# Altium PCB black_V6.PcbDoc
Units mil, origin at the board's own origin, x right, y up, seen from the top; angles counter-clockwise.
Board outline 3814 x 3789 mil, 2 copper layers (Top Layer, Bottom Layer); 76 components, 81 nets, 250 pads, 50 vias.
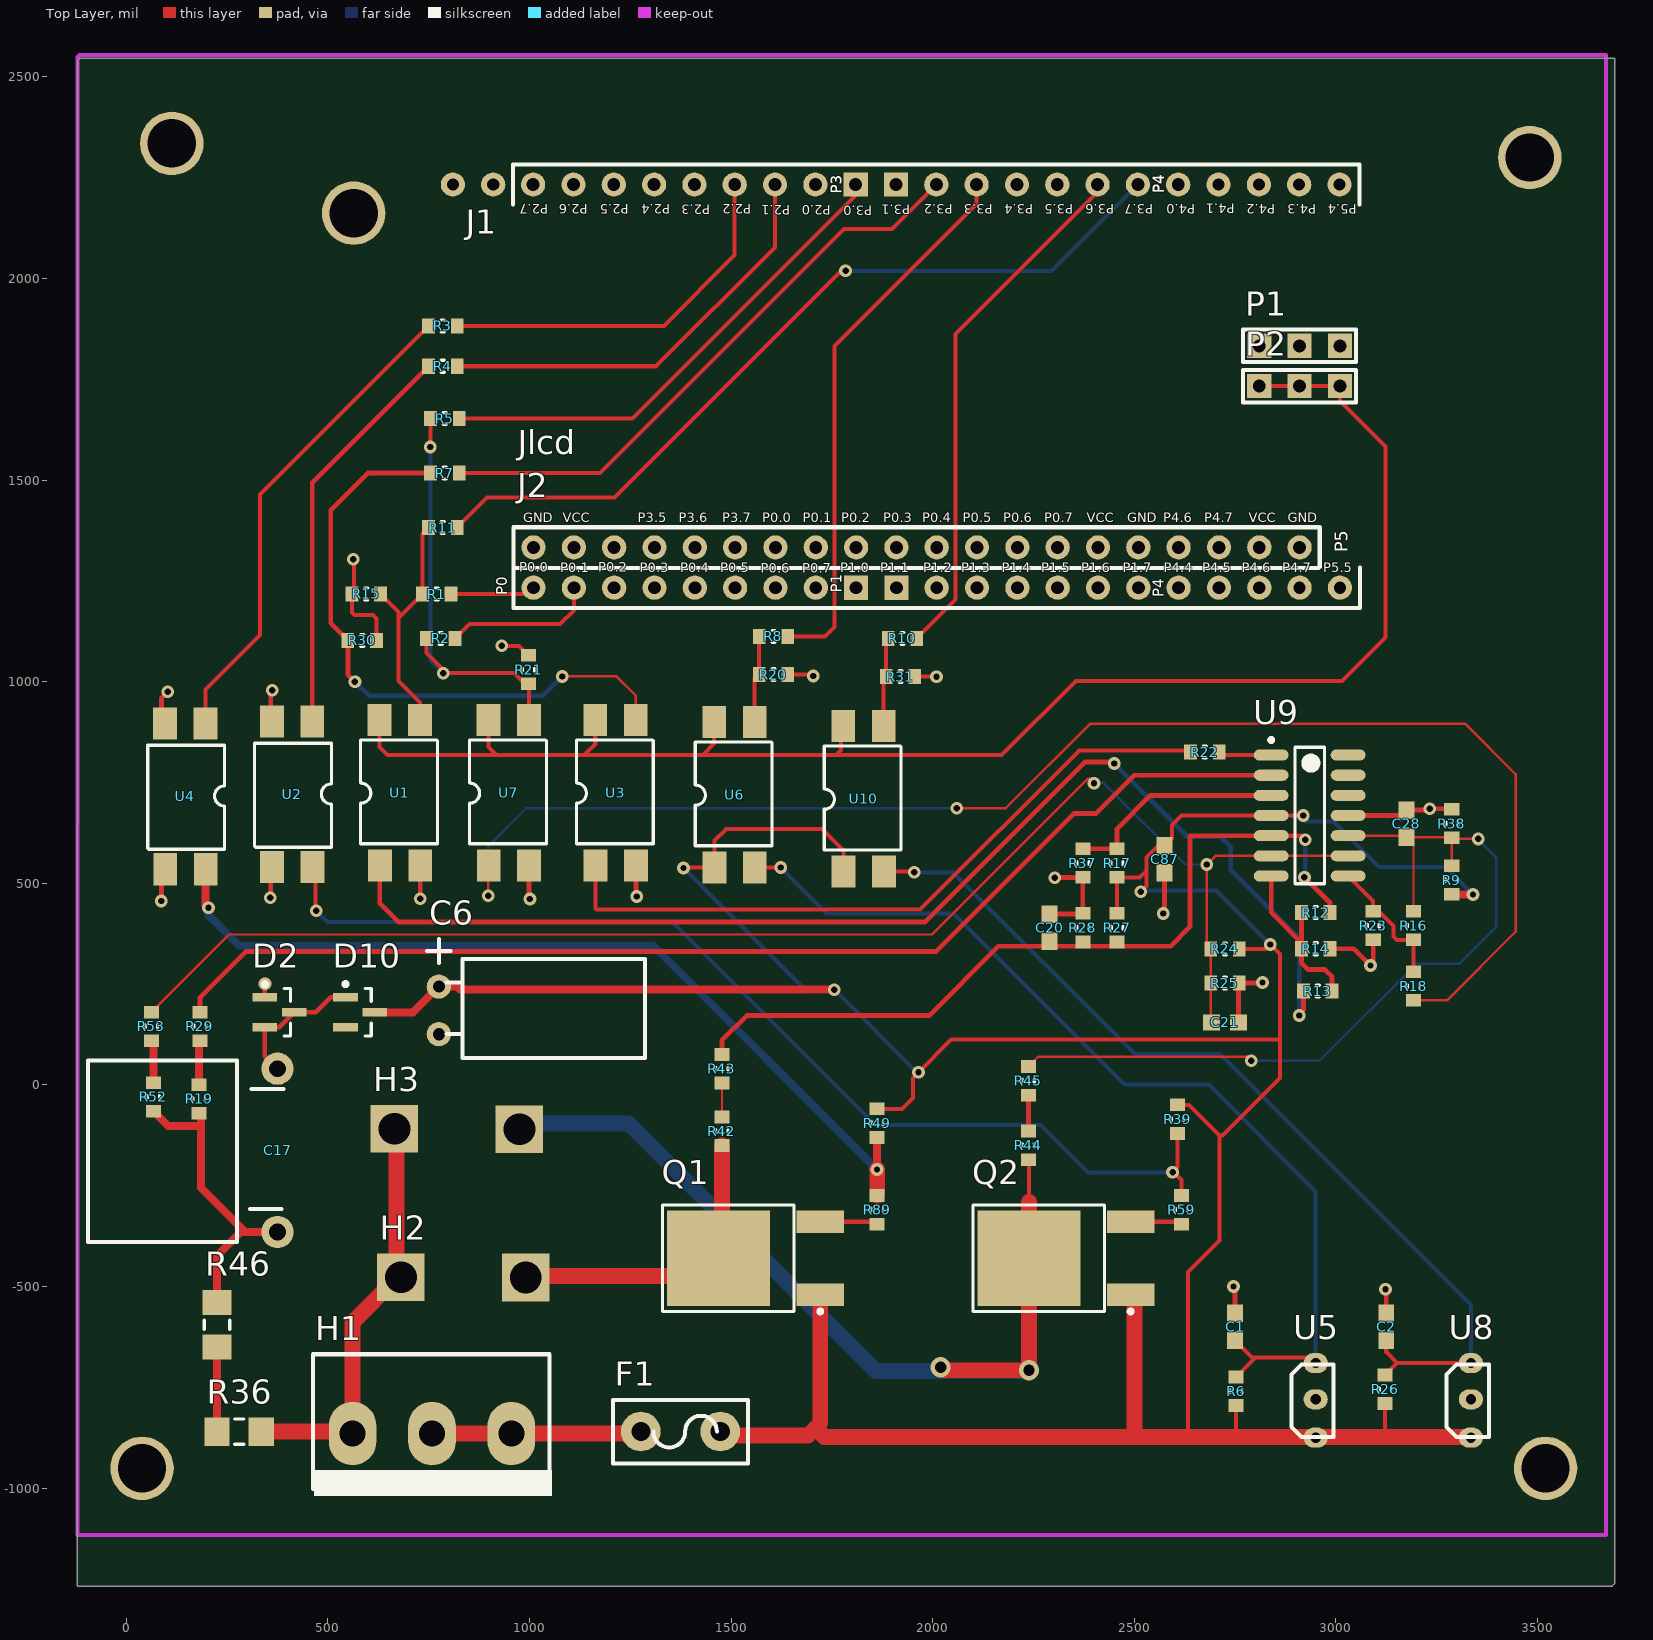
[diagram p0: Top Layer view]
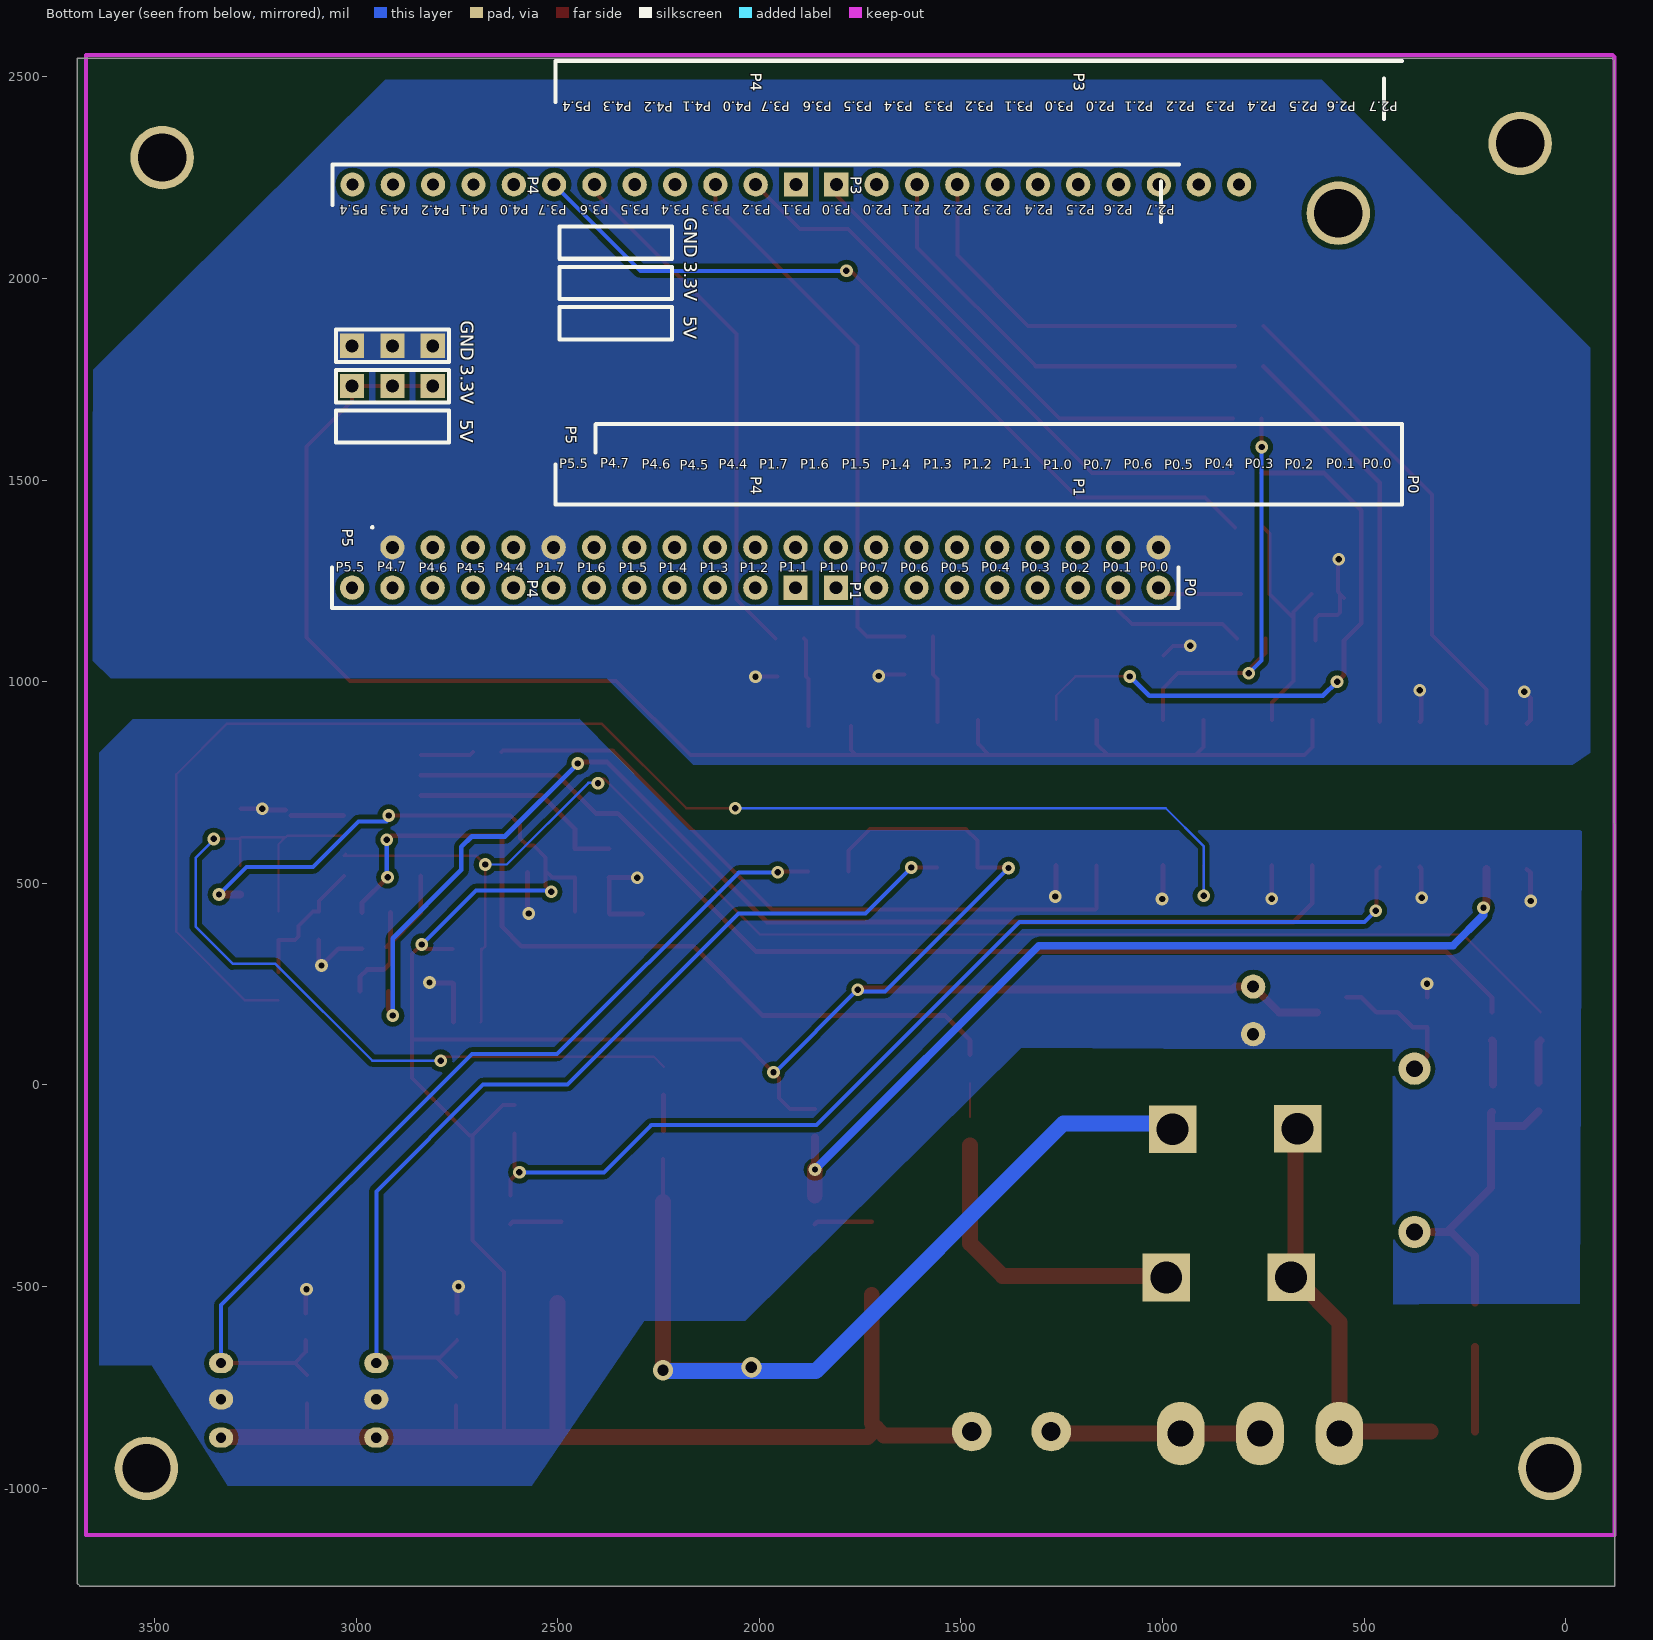
[diagram p1: Bottom Layer view, seen from below]

## Layer stack, top to bottom
Top Solder: solder mask 0.4, Solder Resist, Dk 3.5
Top Layer: signal copper 1.4
Dielectric1: dielectric 12.6, FR-4, Dk 4.8
Bottom Layer: signal copper 1.4
Bottom Solder: solder mask 0.4, Solder Resist, Dk 3.5

## Board outline
-121,2540 -115,2546 3692,2546 3692,-1236 3685,-1243 -122,-1243

## Design rules (kind name [scope] priority, off if disabled: settings)
Clearance Clearance_1 [All] p1: gap=11.81 ignorepadtopadclearanceinfootprint=FALSE except(0: Arc-Hole Track-Hole SMDPad-Hole THPad-Hole Via-Hole Fill-Hole Poly-Hole Region-Hole Text-Hole)
Clearance [All] p2 off: gap=8 ignorepadtopadclearanceinfootprint=FALSE except(0: Arc-Hole Track-Hole SMDPad-Hole THPad-Hole Via-Hole Fill-Hole Poly-Hole Region-Hole Text-Hole)
FabricationTestPointUsage TestPointUsage [All] p1: valid=0 allowmultiple=FALSE
FabricationTestpoint Testpoint [All] p1: side=3 testpointundercomponent=TRUE minsize=40 maxsize=100 preferedsize=60 minholesize=0 maxholesize=40 preferedholesize=32 testpointgrid=1 allowsidetop=TRUE allowsidebottom=TRUE usegrid=TRUE gridtolerance=0.01
PlaneConnect [All] p1: planeconnectstyle=Direct reliefexpansion=20 reliefentries=4 reliefconductorwidth=10 reliefairgap=10
PolygonConnect [All] p1: connectstyle=Direct reliefconductorwidth=10 reliefentries=4 polygonreliefangle="90 Angle" airgapwidth=10
RoomDefinition black_V4 [InComponentClass('black_V4')] p1: confinementstyle=ConfineIn formatcopy=TRUE lockcomponents=FALSE outline -122,-1249 3730,-1249 3730,2533 -122,2533
RoutingVias [All] p1: holewidth=15.75 width=31.5 viastyle="Through Hole" minholewidth=15.75 minwidth=31.5 maxholewidth=15.75 maxwidth=31.5
ShortCircuit [All] p1 off: allowed=FALSE
SilkToSolderMaskClearance SilkscreenOverComponentPads [IsPad] p1: minsilkscreentomaskgap=10 clearancetoexposedcopper=TRUE
SolderMaskExpansion [All] p1: expansion=4
UnRoutedNet [All] p1 off:
Width [All] p1: maxlimit=78.74 minlimit=6 preferedwidth=10 minimp=50.000000 maximp=50.000000 favimp=50.000000
24 further rules are at their usual default settings.

## Components (designator, comment, footprint, x,y, rotation, side; value= is the part's Value field where it differs from the comment)
C1 "0.01u" 1608[0603] 2750,-600 r90 top
C2 "0.01u" 1608[0603] 3125,-600 r90 top
C6 "Tan-cap" ecap 1090,165 r270 top
C17 "220n" filmcap 120,-255 r180 top
C20 "0.1u" 1608[0603] 2290,390 r90 top
C21 "0.1u" 1608[0603] 2725,155 r0 top
C28 "0.1u" 1608[0603] 3175,648 r90 top
C87 "0.1u" 1608[0603] 2575,560 r90 top
D2 "BAT54S" SOT23_D 355,180 r270 top
D10 "BZX84-C5V1" SOT23_D 555,180 r270 top
F1 "Fuse 1A" FUSE_L 1355,-840 r270 top
H1 "MOT" H_3 760,-865 r0 top
H2 "MOT1" MOT 991,-537 r180 top
H3 "MOT2" MOT 975,-169.06 r180 top
J1 "" J1 1009,2233 r0 top
J2 "" J2 1010,1233 r0 top
Jlcd "LED1602-12864" jlcd 1010,1333 r0 top
P1 "Header 3" PP 3010,1833 r180 top locked
P2 "Header 3" PP 3010,1733 r180 top locked
Q1 "BTA204S-800C" SCR 1630,-455 r180 top
Q2 "BTA204S-800C" SCR 2400,-455 r180 top
R1 "0" R0603 750,1215 r90 top
R2 "0" R0603 760,1105 r90 top
R3 "0" R0603 765,1880 r90 top
R4 "0" R0603 765,1780 r90 top
R5 "0" R0603 770,1650 r90 top
R6 "10k" R0603 2750,-740 r0 top
R7 "0" R0603 770,1515 r90 top
R8 "0" R0603 1585,1110 r90 top
R9 "20k" R0603 3285,528 r0 top
R10 "0" R0603 1905,1105 r90 top
R11 "0" R0603 765,1380 r90 top
R12 "20k" R0603 2930,425 r90 top
R13 "20k" R0603 2935,230 r90 top
R14 "20k" R0603 2970,340 r270 top
R15 "10k" R0603 615,1220 r270 top
R16 "20k" R0603 3195,375 r180 top
R17 "100k" R0603 2455,570 r0 top
R18 "20k" R0603 3195,225 r180 top
R19 "470K" R0603 182.64,-54.96 r180 top
R20 "10k" R0603 1585,1015 r90 top
R21 "10k" R0603 1000,1010 r180 top
R22 "3k" R0603 2655,823 r90 top
R23 "20k" R0603 3095,375 r180 top
R24 "20k" R0603 2705,335 r90 top
R25 "20k" R0603 2745,255 r270 top
R26 "10k" R0603 3120,-735 r0 top
R27 "20k" R0603 2460,370 r180 top
R28 "20k" R0603 2370,410 r0 top
R29 "470K" R0603 185,125 r180 top
R30 "10k" R0603 565,1100 r90 top
R31 "10k" R0603 1900,1010 r90 top
R36 "470" 3216[1206] 280,-860 r180 top
R37 "100k" R0603 2375,530 r180 top
R38 "20k" R0603 3285,668 r0 top
R39 "10k" R0603 2605,-65 r0 top
R42 "330K" R0603 1475,-95 r0 top
R43 "330K" R0603 1475,60 r0 top
R44 "330K" R0603 2235,-130 r0 top
R45 "330K" R0603 2235,30 r0 top
R46 "470" 3216[1206] 225,-595 r90 top
R49 "10k" R0603 1860,-75 r0 top
R52 "330K" R0603 65,-10 r0 top
R53 "330K" R0603 60,165 r0 top
R59 "33" R0603 2615,-290 r0 top
R89 "33" R0603 1860,-290 r0 top
U1 "PS2501" DIP-4SMD 685,720 r90 top
U2 "PS2501" DIP-4SMD 405,725 r270 top
U3 "PS2501" DIP-4SMD 1220,720 r90 top
U4 "PS2501" DIP-4SMD 140,720 r270 top
U5 "HALL" M1881 2950,-795 r90 top
U6 "PS2501" DIP-4SMD 1515,715 r90 top
U7 "PS2501" DIP-4SMD 955,720 r90 top
U8 "HALL" M1881 3335,-795 r90 top
U9 "LM324" SOP14 2935,668 r0 top
U10 "PS2501" DIP-4SMD 1835,705 r90 top

## Footprints (in the part's own frame and the unit in brackets; to place one, negate y for a bottom-side part, rotate by r counter-clockwise, add the part's x,y. Pads: shape width x height; smd on the part's side, far side on the other; paste and mask are expansions set on the pad)
1608[0603] [mm] "Chip Capacitor; Body 1.6 x 0.8 mm (LxW typ)"
  rect 1.1x1 smd: 1(-0.85,0) 2(0.85,0)
3216[1206] [mm] "Chip Resistor; Body 3.2 x 1.6 mm (LxW typ)"
  rect 1.6x1.8 smd: 1(-1.4,0) 2(1.4,0)
  silkscreen extent -0.3,-0.8 0.3,0.8
DIP-4SMD [mil]
  rect 80x59.06 smd: 1(-176.07,56.13) 2(-176.07,-43.87) 3(184.95,-43.47) 4(184.95,56.92)
  silkscreen extent -122,-87 136,104
ecap [mil]
  round 60 hole 30: 1(-78.74,-314.96) 2(39.37,-314.96)
  silkscreen extent -197,-344 98,197
filmcap [mil]
  round 80 hole 42: 1(-255,110) 2(-255,-295)
  silkscreen extent -270,-315 215,135
FUSE_L [mm]
  round 2.5 hole 1.2: 1(0.5,3) 2(0.5,-2)
  silkscreen extent -1.49,-3.75 2.51,4.75
H_3 [mm]
  oval 3x4 hole 1.65: 1(-5.047,0) 2(-0.047,0) 3(4.953,0)
  silkscreen extent -7.55,-3.94 7.51,5
J1 [mil]
  round 60 hole 32: 1(0,0) 2(100,0) 3(200,0) 4(300,0) 5(400,0) 6(500,0) 7(600,0) 8(700,0) 11(1000,0) 12(1100,0) 13(1200,0) 14(1300,0) 15(1400,0) 16(1500,0) 17(1600,0)
  rect 60x60 hole 32: 9(800,0) 10(900,0)
  round 60 hole 30: 18(1700,0) 19(1800,0) 20(1900,0) 21(2000,0)
  silkscreen extent -50,-50 2050,50
J2 [mil]
  round 60 hole 32: 1(0,0) 2(100,0) 3(200,0) 4(300,0) 5(400,0) 6(500,0) 7(600,0) 8(700,0) 11(1000,0) 12(1100,0) 13(1200,0) 14(1300,0) 15(1400,0) 16(1500,0) 17(1600,0) 18(1700,0)
  rect 60x60 hole 32: 9(800,0) 10(900,0)
  round 60 hole 30: 19(1800,0) 20(1900,0) 21(2000,0)
  silkscreen extent -50,-50 2050,50
jlcd [mil]
  round 60 hole 32: 1(0,0) 2(100,0) 3(200,0) 4(300,0) 5(400,0) 6(500,0) 7(600,0) 8(700,0) 9(800,0) 10(900,0) 11(1000,0) 12(1100,0) 13(1200,0) 14(1300,0) 15(1400,0) 16(1500,0) 17(1600,0) 18(1700,0) 19(1800,0) 20(1900,0)
  silkscreen extent -50,-51 1950,50
M1881 [mil]
  oval 50x60 hole 25.59: 1(-80,0) 2(15,0) 3(105,0)
  silkscreen extent -79,-45 101,60
MOT [mm]
  rect 3x3 hole 2: 1(0,-1.5) 2(7.874,-1.524)
PP [mil]
  rect 60x60 hole 32: 1(0,0) 2(100,0) 3(200,0)
  silkscreen extent -40,-40 240,40
R0603 [mm]
  rect 0.95x0.8 smd: 1(0.06,0.392) 2(0.06,-1.408)
  silkscreen extent -0.32,-0.61 0.44,-0.41, body extent -0.39,-1.36 0.51,0.34, height 0.6
SCR [mm]
  rect 6.5x6 smd: 1(4.095,-0.635)
  rect 3x1.4 smd: 2(-2.315,-2.935) 3(-2.315,1.665)
  silkscreen extent -2.44,-3.98 7.62,2.84, body extent -1.21,-3.99 7.24,2.72, height 1.8
SOP14 [mm] "TSOP, 14-Leads, Body 8.6x4.0mm (max), Pitch 1.27mm, IPC Medium Density"
  oval 2.2x0.7 smd: 1(-2.425,3.81) 2(-2.425,2.54) 3(-2.425,1.27) 4(-2.425,0) 5(-2.425,-1.27) 6(-2.425,-2.54) 7(-2.425,-3.81) 8(2.425,-3.81) 9(2.425,-2.54) 10(2.425,-1.27) 11(2.425,0) 12(2.425,1.27) 13(2.425,2.54) 14(2.425,3.81)
  silkscreen extent -2.55,-4.3 0.93,4.88, body extent -2,-4.33 2,4.33, height 1
SOT23_D [mm]
  rect 0.55x1.55 smd: 1(-0.95,-0.29) 2(0.95,-0.29) 3(0,1.56)
  silkscreen extent -1.9,-0.41 1.5,1.34, body extent -1.5,-0.06 1.5,1.34, height 1.1

## Part data
C1 C2 C17 C20 C21 C28 C87: library part "CAP NP", "CAP NL"
C6: library part "Cap Pol1", "Polarized Capacitor (Radial)"
D10: library part "D Zener", "Zener Diode"
F1: library part "Fuse 2", "Fuse"
H1 U5 U8: library part "Header 3", "Header, 3-Pin"
H2 H3: library part "Header 2", "Header, 2-Pin"
J1: library part P152
J2: library part P151
P1 P2: "Header, 3-Pin"
Q1 Q2: library part SCR, "Silicon Controlled Rectifier"
R1 R2 R3 R4 R5 R6 R7 R8 R9 R10 R11 R12 R13 R14 R15 R16 R17 R18 R19 R20 R21 R22 R23 R24 R25 R26 R27 R28 R29 R30 R31 R36 R37 R38 R39 R42 R43 R44 R45 R46 R49 R52 R53 R59 R89: library part RES, "RES"
U1 U2 U3 U4 U6 U7 U10: library part Optoisolator1, "4-Pin Phototransistor Optocoupler"

## Free pads (board coordinates)
  round 60 hole 30: 0(910,2233) 1(810,2233)
  round 157.48 hole 120.08: 3(39,-951) 3(113,2335) 3(564,2162) 3(3481,2300) 3(3520,-951)

## Via types
v1: diameter 31.5, hole 15.75, Top Layer to Bottom Layer, 48 vias
v2: diameter 50, hole 28, Top Layer to Bottom Layer, 2 vias

## Nets (pads, with @x,y where several pads share a name; then routed paths per layer and width w, separated by ;. In a path a pad name is that pad's centre, name@x,y a point inside that pad or via, vN(x,y) a via of type N, cw(c..) or ccw(c..) an arc to the next point about the centre after c; other vN are vias at no path point)
3V3: P2.1 P2.2 P2.3 U1.4 U3.4 U6.4 U7.4 U10.4 | length 3930.6
  Top Layer w10: U1.4 628.08,837.92 648,818 918,818 ; U7.4 898.08,837.92 918,818 ; U3.4 1163.08,845.92 1135.16,818 ; U6.4@1458.08,904.95 U6.4 1458.08,846.08 1430,818 ; U10.4@1773.08,889.95 1773.08,831.08 1760,818 ; P2.3 P2.2 P2.1 3010,1696 3123,1583 3123,1110 3015,1002 2355,1002 2171,818 1760,818 ; 918,818 1135.16,818 ; 1135.16,818 1430,818 ; 1430,818 1760,818
5V: C6.1 C87.2 D10.3 F1.1 Q1.3 Q2.3 R6.2 R9.2 R17.2 R24.2 R26.2 R27.2 R39.1 R49.1 U5.1 U6.1 U8.1 U9.4 U10.1 | length 9487.6
  Top Layer w10: v1@1382.93,538.93 U6.1 1458.87,605.87 1488,635 1725,635 1778.87,581.13 U10.1 ; R49.1 1924.43,-59.57 1951,-33 1951,17 v1(1965,31) 2046,112 2861,112 ; R27.2@2457.36,429.84 R17.2 2513.57,514.57 2530,531 ; v1(2516.29,479.29) 2530,493 2530,531 ; R39.1 2635.57,-49.57 2711,-125 2711,-386 2633,-464 2633,-859 2640,-866 ; 2719,-125 2861,17 2861,112 ; 2752.36,-869.64 R6.2 ; R24.2 2826.36,337.36 v1(2837,348) 2861,324 2861,112 ; v1(2919,668) U9.4 2617,668 2593,644 2593,611.46 C87.2 2559.46,593.46 2530,564 2530,531 ; 3122.36,-872.36 R26.2
  Top Layer w19.68: D10.3 711.3,180 C6.1 819.26,243.74 827,236 v1(1756,236) ; R9.2 3339.43,472.57 v1(3340,472)
  Top Layer w39.37: F1.1@1472,-869.68 1690.91,-869.68 1709.45,-851.14 ; Q1.3 1721.14,-839.45 1709.45,-851.14 ; Q2.3@2501,-540.55 2501,-873 ; U8.1@3335,-873 2501,-873 ; 1709.45,-851.14 1731.31,-873 1964,-873 2501,-873
  Bottom Layer w10: v1(1382,538) 1688,232 v1@1752,232 ; v1(1756,236) v1@1962,30 ; v1(2516.29,479.29) 2519,482 2703,482 v1(2837,348) v1@2837,349 ; v1(2919,668) 2919,659 2925,653 2994,653 3106.56,540.44 3271.56,540.44 v1(3340,472)
A: J1.9 R5.2 | length 1239.9
  Top Layer w10: R5.2 1255.36,1652.36 1809,2206 J1.9
AC: R7.1 R30.1 U3.3 | length 1551.8
  Top Layer w6: v1(1081,1013) 1216,1013 1263.47,965.53 U3.3
  Top Layer w11.81: v1(567,1000) 549.57,1017.43 R30.1 507,1144.93 507,1425 599.36,1517.36 R7.1
  Bottom Layer w6: v1@1076,1013 v1(1081,1013)
  Bottom Layer w11.81: v1(567,1000) 602,965 1033,965 v1(1081,1013)
AC_DET: C17.1 R19.1 R46.2 R52.2 | length 767.6
  Top Layer w19.68: R52.2 103.93,-102 185,-102 ; R19.1@182.64,-67 185,-69.36 185,-102 ; R46.2 225,-424 284,-365 295,-365 ; C17.1 295,-365 ; 185,-102 185,-255 295,-365
AGND: Jlcd.1 Jlcd.16 Jlcd.20 P1.1 P1.2 P1.3 R15.2 R20.2 R21.2 R30.2 R31.2 U2.2 U4.2 | length 638.6
  Top Layer w10: R15.2@549.57,1207.64 R15.2 ; v1(562.53,1304) 563.1,1304 565,1302.1 565,1223.07 R15.2 ; R30.2 620.43,1156.57 612,1165 566,1165 559.57,1171.43 R15.2 ; v1(931,1089) 974.07,1089 R21.2 ; R20.2 1693.64,1017.36 1695,1016 1702,1016 v1(1704,1014) ; R31.2 v1(2009.64,1012.36)
  Top Layer w11.81: U4.2 87.57,904.64 87.57,959.57 v1(103,975) ; U2.2 358,904.2 358,978 359,979 v1(362,979)
B: J1.10
GND: C1.2 C2.2 C6.2 C20.2 C21.2 C28.2 C87.1 D2.1 R14.1 R23.1 R25.1 R28.1 R37.1 R38.1 U1.2 U2.3 U3.2 U4.3 U5.2 U7.2 U8.2 U9.11 | length 1500.1
  Top Layer w11.81: v1(87,456) 87,525.52 U4.3 ; D2.1 343.58,250.58 v1(344,251) ; v1@358,460 358,536.52 U2.3 ; U1.2 728.87,461.87 v1(729.13,461.87) ; U7.2 998.87,463.13 v1(1001,461) ; U3.2 1263.87,468.07 1264.94,467 v1(1266,467) ; C20.2 2370.39,423.46 R28.1 R37.1@2372.36,514.29 ; v1(2303,514) 2372.07,514 R37.1@2372.36,514.29 ; R37.1 R37.1@2372.36,514.29 ; v1(2572,425) 2575,428 C87.1 ; v1(2746,-500) 2750,-504 C1.2 ; C21.2 2758.46,250.67 R25.1 2816.64,252.64 v1(2818,254) ; R14.1 3044.36,337.64 v1(3086,296) 3092.64,302.64 R23.1 ; U9.11 C28.2@3161.54,668 ; v1(3123,-507) 3125,-509 C2.2 ; C28.2 3229.46,681.46 v1(3233,685) R38.1@3285.8,685
  other v1: 357,464
HALL1: R8.1 R20.1 U6.3 | length 217
  Top Layer w10: U6.3 1558.47,1006.27 R20.1 R8.1
HALL2: R10.1 R31.1 U10.3 | length 222
  Top Layer w10: U10.3 1878.47,1006.27 R31.1 1884.57,1102.36 R10.1
HALLA: R1.1 R11.1 R15.1 U1.3 | length 608.7
  Top Layer w10: R15.1 675,1173.07 675,1157.8 ; U1.3 728.47,948.53 675,1002 675,1157.8 ; R11.1 734.57,1367.36 R1.1 675,1157.8
HALLB: R2.1 R5.1 R21.1 U7.3 | length 1052.4
  Top Layer w10: R2.1 744.57,1071 v1@790.28,1025.28 ; v1(754,1582) 754.57,1582.57 R5.1 ; v1(786,1021) 961,1021 998.47,983.53 U7.3
  Bottom Layer w10: v1(754,1582) 754,1053 v1(786,1021)
I1: C20.1 R12.2 R27.1 R28.2 R43.1 U9.5 | length 2036.1
  Top Layer w11.81: R43.1 1477.36,110.36 1539,172 1991,172 2163,344 2590,344 2638,392 2638,618 U9.5 2914,618 v1(2924,608) ; v1(2922,515) 2985.43,451.57 R12.2
  Bottom Layer w11.81: v1(2922,515) 2924,517 v1(2924,608)
I2: C28.1 R9.1 R16.2 R38.2 R45.1 U9.10 | length 2135
  Top Layer w6: R45.1 2261.93,70 2780,70 v1(2790,60) ; U9.10 3171.54,618 C28.1 ; R16.2 3192.64,596.9 C28.1 ; R38.2@3285.39,614.54 C28.1 ; R9.1 R38.2 3289.93,610 v1(3353,610)
  Bottom Layer w6: v1(2790,60) 2960,60 3200,300 3305,300 3398,393 3398,563 3351,610 v1(3353,610)
I-: C21.1 R24.1 R25.2 R53.1 U9.6 U9.9 | length 3720.4
  Top Layer w6: R53.1 254.93,373 1998,373 2384,759 2397,759 2400,756 v1(2400,748) ; v1@2680.06,552.12 v1(2680.06,546.48) ; R24.1@2687.5,335.3 2680.06,342.74 v1(2680.06,546.48) ; R24.1 R25.2 2689.57,156.97 C21.1 ; U9.9@3025.47,573 U9.9 U9.6 2701.58,568 v1(2680.06,546.48)
  Bottom Layer w6: v1(2400,748) 2401,749 2424,749 2626.52,546.48 v1(2680.06,546.48)
MOS1: R4.1 U2.1 | length 1000.8
  Top Layer w11.81: U2.1 461.13,1493.93 R4.1
MOS2: R3.1 U4.1 | length 1215.5
  Top Layer w10: U4.1 196.13,981.13 331,1116 331,1463.8 R3.1
MOT1+: H2.1 Q1.1 R42.2 | length 757.1
  Top Layer w39.37: H2.1@1007.5,-447.5 1034,-474 1396.67,-474 1477.36,-393.31 R42.2
MOT2+: H3.1 Q2.1 R44.2 | length 2263.6
  Top Layer w10: 2238.78,-289.78 R44.2@2238.78,-184.02
  Top Layer w39.37: v2(2019.78,-700.22) 2027.56,-708 v2(2238.78,-708) Q2.1 2238.78,-289.78
  Bottom Layer w39.37: H3.1@966,-95.94 1245.94,-95.94 1860,-710 v1@2229,-710
  other v1: 2234,-705
MOT-: H1.1 H2.2 H3.2 R36.1 | length 1034.9
  Top Layer w39.37: R36.1 H1.1@556.3,-860 ; H1.1 561.3,-588.7 670,-480 670,-126 H3.2@649,-105
NetC1_1: C1.1 R6.1 U5.3 U6.2 | length 2441.9
  Top Layer w10: U6.2 1622.93,538.93 v1(1623,539) ; C1.1 2792.54,-676 2800.93,-676 ; R6.1 2800.93,-676 ; U5.3 2936,-676 2818,-676 2800.93,-676
  Bottom Layer w10: v1(1623,539) 1737,425 2052,425 2476,1 2685,1 2950,-264 U5.3
NetC2_1: C2.1 R26.1 U8.3 U10.2 | length 2338
  Top Layer w10: U10.2 1952.07,528.93 v1(1954,527) ; R26.1 3151.93,-690 ; C2.1 3125,-663.07 3151.93,-690 ; U8.3 3151.93,-690
  Bottom Layer w10: v1(1954,527) 2051,527 2502,76 2713,76 3335,-546 U8.3
NetC17_2: C17.2 D2.2 D2.3 D10.1 | length 346.6
  Top Layer w11.81: C17.2 343.58,71.42 D2.2 379.02,142.6 D2.3 470,180 507.4,217.4 D10.1
NetF1_2: F1.2 H1.2 H1.3 | length 510.9
  Top Layer w39.37: H1.2 H1.3 F1.2@1269,-865
NetQ1_2: Q1.2 R89.2 | length 143.7
  Top Layer w11.81: Q1.2 1856.38,-339.45 R89.2
NetQ2_2: Q2.2 R59.2 | length 128.7
  Top Layer w11.81: Q2.2 2611.38,-339.45 R59.2
NetR13_1: R13.1 U1.1 | length 3027.6
  Top Layer w11.81: U1.1 628.87,450.13 675,404 1981,404 2377.46,800.46 2444.54,800.46 2448,797 v1(2450,797) ; v1(2909,172) 2909,176 2919.57,186.57 R13.1
  Bottom Layer w11.81: v1(2450,797) 2631,616 2713,616 2739,590 2739,533 2909,363 v1(2909,172)
NetR17_1: R17.1 R37.2 U9.3 | length 551
  Top Layer w11.81: R37.2 R17.1 2457.36,635.36 2540,718 U9.3
NetR18_1: R18.1 U7.1 | length 3638.4
  Top Layer w6: v1(898,469) 898,543.06 U7.1 ; v1(2060,686) 2181,686 2391,896 3320,896 3446,770 3446,380 3275.57,209.57 R18.1
  Bottom Layer w6: v1(898,469) 898,592 992,686 v1(2060,686)
NetR19_2: R19.2 R29.1 | length 110.1
  Top Layer w19.68: R19.2 180.28,107.2 R29.1
NetR22_1: R22.1 U3.1 | length 1749
  Top Layer w10: U3.1 1163.87,437.13 1166.56,434.44 1968.44,434.44 2363.56,829.56 2635.37,829.56 R22.1
NetR22_2: R22.2 U9.1 | length 132.1
  Top Layer w10: R22.2 2717.8,818 U9.1
NetR29_2: R29.2 U9.2 | length 2921.5
  Top Layer w11.81: R29.2 182.64,216.64 297,331 2009,331 2351.25,673.25 2405.25,673.25 2500,768 U9.2
NetR36_2: R36.2 R46.1 | length 209.8
  Top Layer w19.68: R36.2@225,-859.88 R46.1
NetR39_2: R39.2 R59.1 U2.4 | length 2668.4
  Top Layer w10: U2.4 469.57,532.4 v1@469.57,437.36 ; v1(2595,-217) v1@2597,-215 ; R39.2 2607.36,-204.64 v1@2597,-215 ; R59.1 2617.36,-235.36 v1@2597,-215
  Bottom Layer w10: v1(471,432) 499,404 1354.56,404 1858.56,-100 2268,-100 2385,-217 v1(2595,-217)
NetR42_1: R42.1 R43.2 | length 84.1
  Top Layer w6: R42.1 R43.2
NetR44_1: R44.1 R45.2 | length 89.1
  Top Layer w11.81: R44.1 R45.2
NetR49_2: R49.2 R89.1 U4.4 | length 2180.3
  Top Layer w19.68: U4.4 196.92,446.08 v1(204,439) ; v1@1862.36,-209.64 R49.2
  Top Layer w39.37: v1(1862,-210) 1862.36,-210.36 R89.1
  Bottom Layer w19.68: v1(204,439) 204,421 280,345 1307,345 v1(1862,-210)
NetR52_1: R52.1 R53.2 | length 106.2
  Top Layer w19.68: R53.2 67.36,104.57 R52.1
P00: J2.1 R1.2 | length 211
  Top Layer w10: R1.2 994.36,1217.36 J2.1
P1: R12.1 R13.2 R14.2 U9.7 | length 461
  Top Layer w11.81: U9.7 2839.53,427.68 R14.2@2924.57,342.64 ; R12.1 R14.2 2914.57,303.43 2932,286 2973,286 2990.43,268.57 R13.2
P01: J2.2 R2.2 | length 379.4
  Top Layer w10: R2.2 851.07,1143 1076,1143 1110,1177 J2.2
P2: R16.1 R18.2 R23.2 U9.8 | length 337
  Top Layer w10: U9.8 3092.64,455.83 R23.2 3106.57,430.43 3143,394 3143,368 3151.43,359.57 R16.1 R18.2
P02: J2.3
P03: J2.4
P04: J2.5
P05: J2.6
P06: J2.7
P07: J2.8
P10: J2.9
P11: J2.10
P12: J2.11
P13: J2.12
P14: J2.13
P15: J2.14
P16: J2.15
P17: J2.16
P20: J1.8
P21: J1.7 R4.2 | length 1066.6
  Top Layer w10: R4.2 1314.36,1782.36 1609,2077 J1.7
P22: J1.6 R3.2 | length 936.3
  Top Layer w10: R3.2 1333.36,1882.36 1509,2058 J1.6
P23: J1.5
P24: J1.4
P25: J1.3
P26: J1.2
P27: J1.1
P32: J1.11 R7.2 | length 1480
  Top Layer w10: R7.2 1174.36,1517.36 1780,2123 1899,2123 J1.11
P33: J1.12 R8.2 | length 1369.2
  Top Layer w10: R8.2 1733.36,1112.36 1756.81,1135.81 1756.81,1832.81 2109,2185 J1.12
P34: J1.13
P35: J1.14
P36: J1.15 R10.2 | length 1311.4
  Top Layer w10: R10.2 2056.81,1203.74 2056.81,1861.81 2409,2214 J1.15
P37: J1.16 R11.2 | length 2040.9
  Top Layer w10: R11.2 895,1456.93 1210.93,1456.93 1773,2019 v1(1784,2019)
  Bottom Layer w10: v1(1784,2019) 2295,2019 J1.16
P40: J1.17
P41: J1.18
P42: J1.19
P43: J1.20
P44: J2.17
P45: J2.18
P46: J2.19
P47: J2.20
P54: J1.21
P55: J2.21
pads on no net: D10.2 Jlcd.2 Jlcd.3 Jlcd.4 Jlcd.5 Jlcd.6 Jlcd.7 Jlcd.8 Jlcd.9 Jlcd.10 Jlcd.11 Jlcd.12 Jlcd.13 Jlcd.14 Jlcd.15 Jlcd.17 Jlcd.18 Jlcd.19 U9.12 U9.13 U9.14

## Polygon pours and split planes (outlines as drawn)
AGND on Bottom Layer "Top Layer-No Net" (solid, pour order 1000): -17,794 2164,794 2378,1008 3609,1008 3655,1054 3652,1774 2928,2493 605,2493 -61,1828 -61,824
GND on Bottom Layer "Top Layer-No Net" (solid, pour order 1001): -40,632 2174,632 2447,908 3554,907 3637,824 3637,-695 3507,-695 3319,-994 2564,-994 2285,-585 2035,-585 1350,92 997,89 429,89 428,-544 365,-544 -34.97,-542.87

## Keep-outs
Keep-Out Layer:
  lines w10: 2518,2554 3670,2554 3670,-1116 -121,-1116 -121,2549 ; 2528,2554 -116,2554 ; -121,2549 -116,2554 ; -121,2549 -116,2554

## Silkscreen, mask and mechanical layers (free items; w line width, h text height)
Top Overlay:
  lines w10: 2960,1313 2960,1383
  text "P4" at 2574,2212 h27.56 r90
  text "P4" at 2574,2212 h27.56 r90
  text "P3" at 1775,2210 h27.56 r90
  text "P3" at 1775,2210 h27.56 r90
  text "P5" at 3030,1321 h31.5 r90
Bottom Overlay:
  lines w10: 2406,1568 2406,1638 2405,1639 406,1639 406,1539 406,1439 2506,1439 2506,1539 ; 2216,1849 2216,1929 ; 2216,1849 2496,1849 ; 2216,1849 2216,1929 ; 2216,1849 2496,1849 ; 2216,1929 2496,1929 ; 2216,1929 2496,1929 ; 2216,1949 2216,2029 ; 2216,1949 2496,1949 ; 2216,1949 2216,2029 ; 2216,1949 2496,1949 ; 2216,2029 2496,2029 ; 2216,2029 2496,2029 ; 2216,2049 2216,2129 ; 2216,2049 2496,2049 ; 2216,2049 2216,2129 ; 2216,2049 2496,2049 ; 2216,2129 2496,2129 ; 2216,2129 2496,2129 ; 2496,1849 2496,1929 ; 2496,1849 2496,1929 ; 2496,1949 2496,2029 ; 2496,1949 2496,2029 ; 2496,2049 2496,2129 ; 2496,2049 2496,2129 ; 2506,2539 2506,2438 2506,2539 ; 2506,2539 406,2539 2506,2539 ; 2770,1593 2770,1673 ; 2770,1593 3050,1593 ; 2770,1593 2770,1673 ; 2770,1593 3050,1593 ; 2770,1593 2770,1673 ; 2770,1593 3050,1593 ; 2770,1673 3050,1673 ; 2770,1673 3050,1673 ; 2770,1673 3050,1673 ; 2770,1693 2770,1773 ; 2770,1693 3050,1693 ; 2770,1693 2770,1773 ; 2770,1693 3050,1693 ; 2770,1693 2770,1773 ; 2770,1693 3050,1693 ; 2770,1773 3050,1773 ; 2770,1773 3050,1773 ; 2770,1773 3050,1773 ; 2770,1793 2770,1873 ; 2770,1793 3050,1793 ; 2770,1793 2770,1873 ; 2770,1793 3050,1793 ; 2770,1793 2770,1873 ; 2770,1793 3050,1793 ; 2770,1873 3050,1873 ; 2770,1873 3050,1873 ; 2770,1873 3050,1873 ; 3050,1593 3050,1673 ; 3050,1593 3050,1673 ; 3050,1593 3050,1673 ; 3050,1693 3050,1773 ; 3050,1693 3050,1773 ; 3050,1693 3050,1773 ; 3050,1793 3050,1873 ; 3050,1793 3050,1873 ; 3050,1793 3050,1873 ; 451,2396 451,2496 451,2396
  text "P3" at 1220,2510 h27.56 r90
  text "P3" at 1220,2510 h27.56 r90
  text "P4" at 2021,2510 h27.56 r90
  text "P4" at 2021,2510 h27.56 r90
  text "P2.7" at 416,2438 h23.62 r180
  text "P2.7" at 416,2438 h23.62 r180
  text "P2.6" at 521,2438 h23.62 r180
  text "P2.6" at 521,2438 h23.62 r180
  text "P2.5" at 615,2438 h23.62 r180
  text "P2.5" at 615,2438 h23.62 r180
  text "P2.4" at 718,2438 h23.62 r180
  text "P2.4" at 718,2438 h23.62 r180
  text "P2.3" at 821,2438 h23.62 r180
  text "P2.3" at 821,2438 h23.62 r180
  text "P2.2" at 920,2438 h23.62 r180
  text "P2.2" at 920,2438 h23.62 r180
  text "P2.1" at 1023,2438 h23.62 r180
  text "P2.1" at 1023,2438 h23.62 r180
  text "P2.0" at 1119,2438 h23.62 r180
  text "P2.0" at 1119,2438 h23.62 r180
  text "P3.0" at 1220,2438 h23.62 r180
  text "P3.0" at 1220,2438 h23.62 r180
  text "P3.1" at 1320,2438 h23.62 r180
  text "P3.1" at 1320,2438 h23.62 r180
  text "P3.2" at 1419,2438 h23.62 r180
  text "P3.2" at 1419,2438 h23.62 r180
  text "P3.3" at 1519,2438 h23.62 r180
  text "P3.3" at 1519,2438 h23.62 r180
  text "P3.4" at 1619,2438 h23.62 r180
  text "P3.4" at 1619,2438 h23.62 r180
  text "P3.5" at 1720,2438 h23.62 r180
  text "P3.5" at 1720,2438 h23.62 r180
  text "P3.6" at 1820,2438 h23.62 r180
  text "P3.6" at 1820,2438 h23.62 r180
  text "P3.7" at 1924,2438 h23.62 r180
  text "P3.7" at 1924,2438 h23.62 r180
  text "P4.0" at 2019,2438 h23.62 r180
  text "P4.0" at 2019,2438 h23.62 r180
  text "P4.1" at 2119,2438 h23.62 r180
  text "P4.1" at 2119,2438 h23.62 r180
  text "P4.3" at 2316,2438 h23.62 r180
  text "P4.3" at 2316,2438 h23.62 r180
  text "P5.4" at 2417,2438 h23.62 r180
  text "P5.4" at 2417,2438 h23.62 r180
  text "P4.2" at 2215,2437 h23.62 r180
  text "P4.2" at 2215,2437 h23.62 r180
  text "GND" at 2186,2151 h31.5 r90
  text "GND" at 2186,2151 h31.5 r90
  text "3.3V" at 2186,2042 h31.5 r90
  text "3.3V" at 2186,2042 h31.5 r90
  text "5V" at 2188,1906 h31.5 r90
  text "5V" at 2188,1906 h31.5 r90
  text "GND" at 2740,1895 h31.5 r90
  text "GND" at 2740,1895 h31.5 r90
  text "GND" at 2740,1895 h31.5 r90
  text "3.3V" at 2740,1786 h31.5 r90
  text "3.3V" at 2740,1786 h31.5 r90
  text "3.3V" at 2740,1786 h31.5 r90
  text "5V" at 2742,1650 h31.5 r90
  text "5V" at 2742,1650 h31.5 r90
  text "5V" at 2742,1650 h31.5 r90
  text "P5" at 2480,1635 h27.56 r90
  text "P4.7" at 2394,1530 h23.62
  text "P0.0" at 503,1529 h23.62
  text "P0.1" at 594,1529 h23.62
  text "P0.3" at 796,1529 h23.62
  text "P0.4" at 895,1529 h23.62
  text "P1.1" at 1396,1529 h23.62
  text "P5.5" at 2496,1529 h23.62
  text "P0.2" at 697,1528 h23.62
  text "P0.6" at 1096,1528 h23.62
  text "P1.2" at 1494,1528 h23.62
  text "P1.3" at 1594,1528 h23.62
  text "P1.5" at 1795,1528 h23.62
  text "P1.6" at 1898,1528 h23.62
  text "P1.7" at 2000,1528 h23.62
  text "P4.4" at 2101,1528 h23.62
  text "P4.6" at 2291,1528 h23.62
  text "P0.5" at 996,1527 h23.62
  text "P0.7" at 1197,1527 h23.62
  text "P1.0" at 1296,1527 h23.62
  text "P1.4" at 1696,1527 h23.62
  text "P4.5" at 2197,1526 h23.62
  text "P0" at 390,1512 h27.56 r90
  text "P4" at 2021,1509 h27.56 r90
  text "P1" at 1220,1504 h27.56 r90

## Text inside footprints (layer, text, board x,y; h text height)
J1: Top Overlay "P4.2" at 2850,2184 h23.62 r180; Top Overlay "P3.0" at 1850,2181 h23.62 r180; Top Overlay "P2.4" at 1349,2184 h23.62 r180; Top Overlay "P2.2" at 1550,2184 h23.62 r180; Top Overlay "P2.3" at 1448,2183 h23.62 r180; Top Overlay "P3.2" at 2050,2184 h23.62 r180; Top Overlay "P4" at 2573,2212 h27.56 r90; Top Overlay "P3" at 1774,2210 h27.56 r90; Top Overlay "P2.0" at 1747,2182 h23.62 r180; Top Overlay "P2.1" at 1647,2182 h23.62 r180; Top Overlay "P2.5" at 1246,2184 h23.62 r180; Top Overlay "P2.6" at 1144,2184 h23.62 r180; Top Overlay "P2.7" at 1047,2184 h23.62 r180; Top Overlay "P3.1" at 1944,2183 h23.62 r180; Top Overlay "P3.3" at 2149,2184 h23.62 r180; Top Overlay "P3.4" at 2249,2184 h23.62 r180; Top Overlay "P3.5" at 2349,2184 h23.62 r180; Top Overlay "P3.6" at 2450,2184 h23.62 r180; Top Overlay "P3.7" at 2547,2184 h23.62 r180; Top Overlay "P4.0" at 2651,2184 h23.62 r180; Top Overlay "P4.1" at 2749,2185 h23.62 r180; Top Overlay "P4.3" at 2951,2184 h23.62 r180; Top Overlay "P5.4" at 3052,2184 h23.62 r180; Bottom Overlay "P2.5" at 1168,2182 h23.62 r180; Bottom Overlay "P3.1" at 1873,2182 h23.62 r180; Bottom Overlay "P5.4" at 2970,2182 h23.62 r180; Bottom Overlay "P4.3" at 2869,2182 h23.62 r180; Bottom Overlay "P4.2" at 2768,2181 h23.62 r180; Bottom Overlay "P3.2" at 1972,2182 h23.62 r180; Bottom Overlay "P3.3" at 2072,2182 h23.62 r180; Bottom Overlay "P3.4" at 2172,2182 h23.62 r180; Bottom Overlay "P3.5" at 2273,2182 h23.62 r180; Bottom Overlay "P3.6" at 2373,2182 h23.62 r180; Bottom Overlay "P4.0" at 2572,2182 h23.62 r180; Bottom Overlay "P2.0" at 1672,2182 h23.62 r180; Bottom Overlay "P2.1" at 1576,2182 h23.62 r180; Bottom Overlay "P2.2" at 1473,2182 h23.62 r180; Bottom Overlay "P2.3" at 1374,2182 h23.62 r180; Bottom Overlay "P2.4" at 1271,2182 h23.62 r180; Bottom Overlay "P3.7" at 2477,2182 h23.62 r180; Bottom Overlay "P2.6" at 1074,2182 h23.62 r180; Bottom Overlay "P4.1" at 2672,2182 h23.62 r180; Bottom Overlay "P3.0" at 1773,2182 h23.62 r180; Bottom Overlay "P2.7" at 969,2182 h23.62 r180; Bottom Overlay "P3" at 1773,2254 h27.56 r90; Bottom Overlay "P4" at 2574,2254 h27.56 r90
J2: Top Overlay "P1.6" at 2368,1271 h23.62; Top Overlay "P0.0" at 974,1273 h23.62; Top Overlay "P0.1" at 1076,1272 h23.62; Top Overlay "P0.2" at 1170,1273 h23.62; Top Overlay "P0.3" at 1274,1272 h23.62; Top Overlay "P0.4" at 1374,1272 h23.62; Top Overlay "P0.5" at 1473,1271 h23.62; Top Overlay "P0.6" at 1574,1270 h23.62; Top Overlay "P0.7" at 1677,1270 h23.62; Top Overlay "P1.1" at 1870,1272 h23.62; Top Overlay "P1.2" at 1977,1272 h23.62; Top Overlay "P1.3" at 2071,1272 h23.62; Top Overlay "P1.4" at 2171,1271 h23.62; Top Overlay "P1.5" at 2269,1271 h23.62; Top Overlay "P1.7" at 2471,1271 h23.62; Top Overlay "P4.7" at 2867,1271 h23.62; Top Overlay "P5.5" at 2969,1272 h23.62; Top Overlay "P4" at 2573,1210 h27.56 r90; Top Overlay "P1" at 1774,1220 h27.56 r90; Top Overlay "P0" at 945,1214 h27.56 r90; Top Overlay "P4.6" at 2767,1272 h23.62; Top Overlay "P4.5" at 2668,1271 h23.62; Top Overlay "P1.0" at 1771,1271 h23.62; Top Overlay "P4.4" at 2573,1272 h23.62; Top Overlay "P5" at 3030,1321 h31.5 r90; Bottom Overlay "P0.2" at 1251,1272 h23.62; Bottom Overlay "P0.1" at 1148,1273 h23.62; Bottom Overlay "P0.3" at 1350,1273 h23.62; Bottom Overlay "P0.4" at 1449,1273 h23.62; Bottom Overlay "P0.5" at 1550,1271 h23.62; Bottom Overlay "P0.6" at 1650,1272 h23.62; Bottom Overlay "P0.7" at 1751,1271 h23.62; Bottom Overlay "P1.1" at 1950,1273 h23.62; Bottom Overlay "P1.2" at 2048,1272 h23.62; Bottom Overlay "P1.3" at 2148,1272 h23.62; Bottom Overlay "P1.4" at 2250,1271 h23.62; Bottom Overlay "P1.5" at 2349,1272 h23.62; Bottom Overlay "P1.7" at 2554,1272 h23.62; Bottom Overlay "P4.4" at 2655,1272 h23.62; Bottom Overlay "P4.6" at 2845,1272 h23.62; Bottom Overlay "P4.7" at 2948,1274 h23.62; Bottom Overlay "P5.5" at 3050,1273 h23.62; Bottom Overlay "P1" at 1774,1248 h27.56 r90; Bottom Overlay "P4" at 2575,1253 h27.56 r90; Bottom Overlay "P0.0" at 1057,1273 h23.62; Bottom Overlay "P1.6" at 2452,1272 h23.62; Bottom Overlay "P0" at 944,1256 h27.56 r90; Bottom Overlay "P4.5" at 2751,1270 h23.62; Bottom Overlay "P1.0" at 1850,1271 h23.62; Bottom Overlay "P5" at 3034,1379 h27.56 r90
Jlcd: Top Overlay "P3.6" at 1370,1396 h23.62; Top Overlay "GND" at 2881,1396 h23.62; Top Overlay "VCC" at 2784,1396 h23.62; Top Overlay "P4.7" at 2674,1396 h23.62; Top Overlay "P3.5" at 1269,1396 h23.62; Top Overlay "P3.7" at 1478,1396 h23.62; Top Overlay "P4.6" at 2572,1396 h23.62; Top Overlay "GND" at 2482,1396 h23.62; Top Overlay "GND" at 984,1396 h23.62; Top Overlay "VCC" at 1083,1396 h23.62; Top Overlay "VCC" at 2382,1396 h23.62; Top Overlay "P0.0" at 1577,1396 h23.62; Top Overlay "P0.2" at 1773,1396 h23.62; Top Overlay "P0.3" at 1877,1396 h23.62; Top Overlay "P0.4" at 1974,1396 h23.62; Top Overlay "P0.5" at 2075,1396 h23.62; Top Overlay "P0.6" at 2175,1396 h23.62; Top Overlay "P0.7" at 2277,1396 h23.62; Top Overlay "P0.1" at 1678,1396 h23.62